# EAGLE board led (EAGLE 7.6.0)
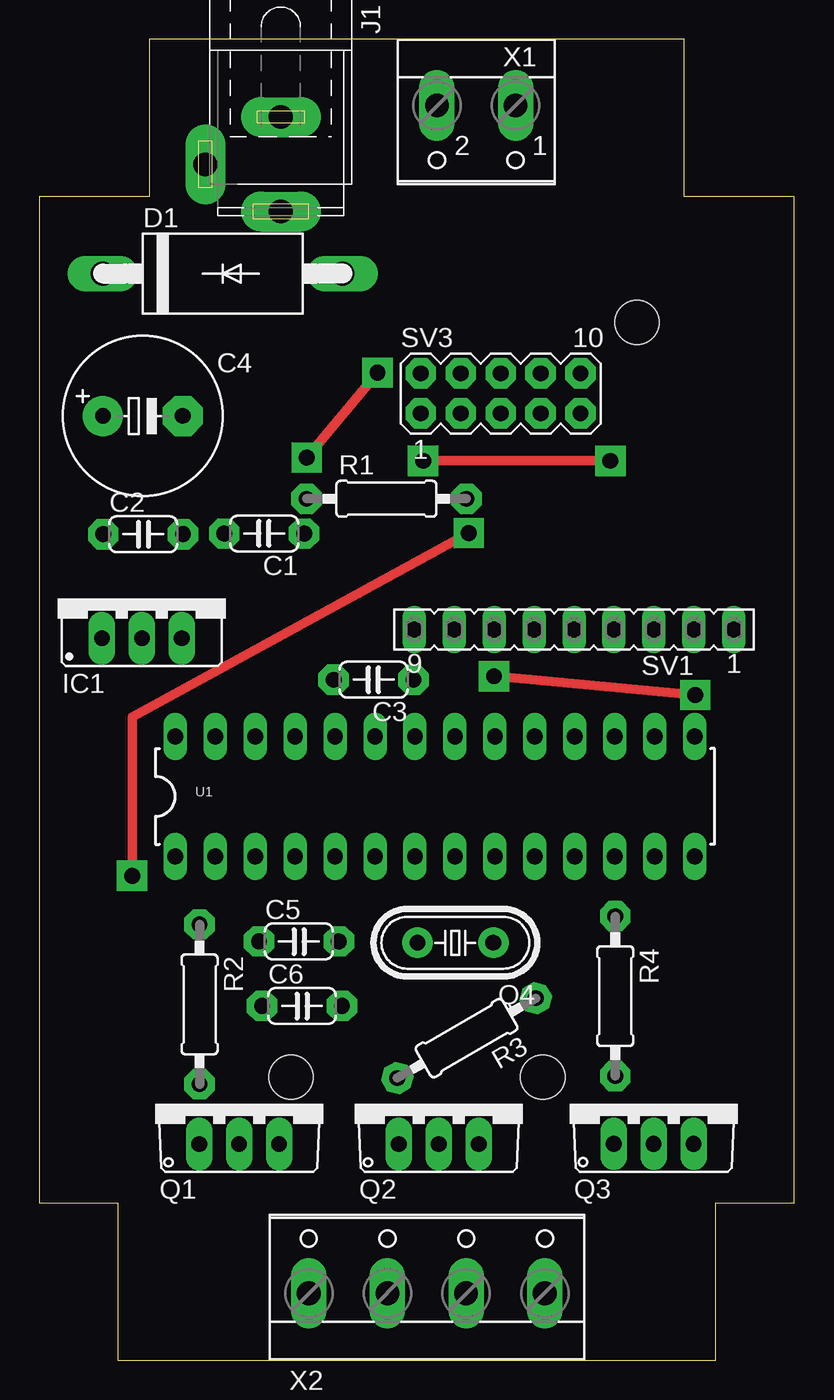
[diagram p0: board, top side]
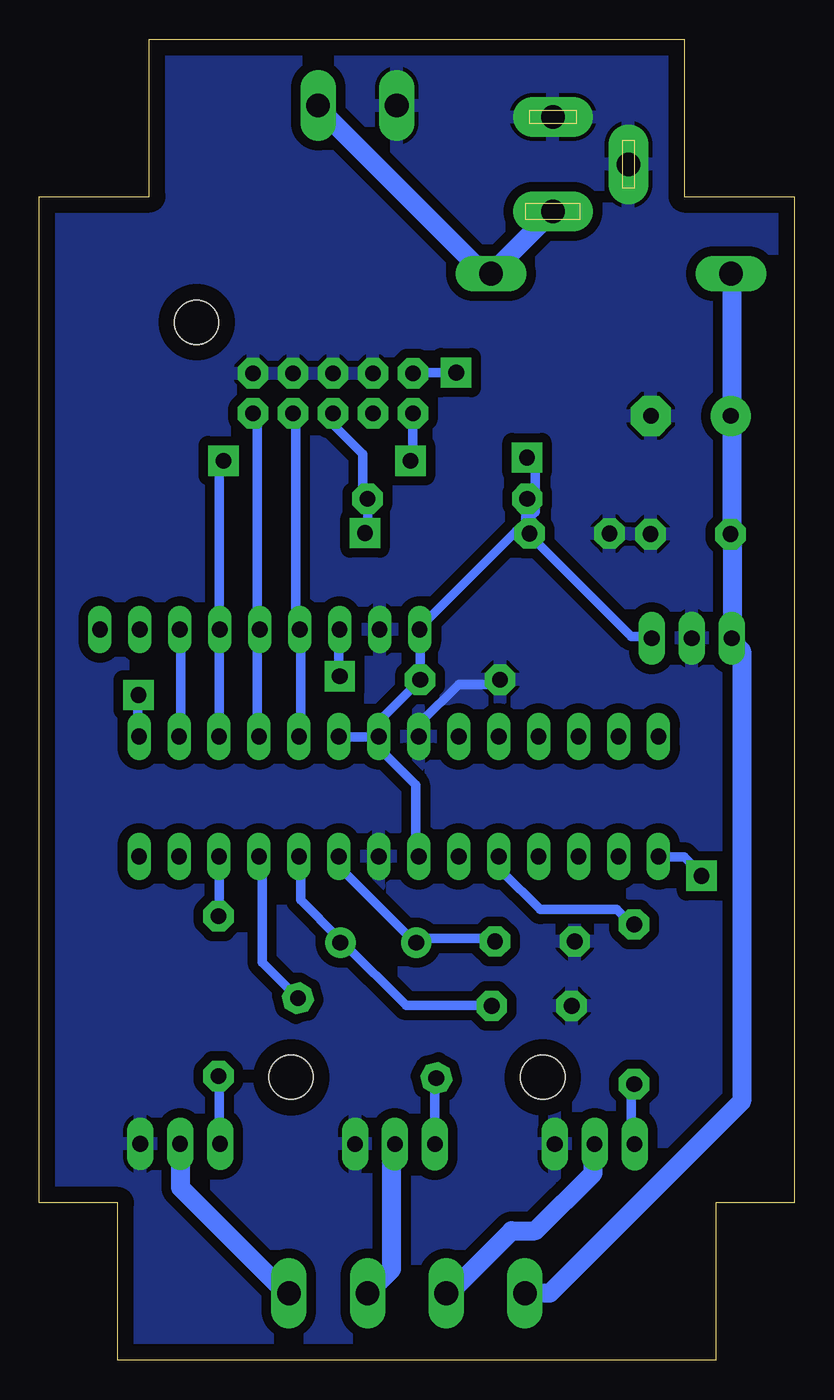
[diagram p1: board, bottom side, seen from below]

Size 48 x 84 mm. Coordinates in mm from the lower left corner, seen from the top.
Outline: 0,10 5,10 5,0 43,0 43,10 48,10 48,74 41,74 41,84 7,84 7,74 0,74 0,10
Copper layers (1*16): Top 0.035mm / dielectric 1.5mm / Bottom 0.035mm
Design rules "default": minimum track width 10mil, minimum drill 24mil, track to track 8mil, track to pad 8mil, pad to pad 8mil, via to via 8mil, smd to smd 8mil, copper to edge 40mil, drill to drill 8mil, minimum pad ring 10mil, minimum via ring 8mil, stop-mask expansion 4mil, vias tented up to drill 0mil, thermal gap 10mil
Net classes: 0 default: width 0.61 mm, clearance 0.61 mm; 1 3amp: width 1.219 mm, clearance 0.813 mm
Holes 2.8 mm at 16,18 32,18 38,66

## Footprints (pad centres in the part's own frame; a part is rotated, then mirrored left to right if it is on the bottom)
C050-024X044 = drill 1 pad 1.93 octagon: 1 -2.54,0; 2 2.54,0
E5-10,5 = drill 1 pad 2.54: + -2.54,0 | drill 1 pad 2.54 octagon: - 2.54,0
DO27-15 = drill 1.5 long: A 7.62,0; C -7.62,0
78XXS = drill 1 pad 1.676 long: GND 0,-2.54; IN -2.54,-2.54; OUT 2.54,-2.54
SPC4078 = drill 1.5 pad 2.54 long: 1 -3,0; 2 0,-4.8; 3 3,0
TO220AV = drill 1 pad 1.676 long: B -2.54,-2.54; C 0,-2.54; E 2.54,-2.54
HC49/S = drill 1 pad 1.93: 1 -2.413,0; 2 2.413,0
0207/10 = drill 1 pad 1.93 octagon: 1 -5.08,0; 2 5.08,0
FE09 = drill 1 long: 1 -10.16,0; 2 -7.62,0; 3 -5.08,0; 4 -2.54,0; 5 0,0; 6 2.54,0; 7 5.08,0; 8 7.62,0; 9 10.16,0
MA05-2 = drill 1 pad 1.93 octagon: 1 -5.08,-1.27; 2 -5.08,1.27; 3 -2.54,-1.27; 4 -2.54,1.27; 5 0,-1.27; 6 0,1.27; 7 2.54,-1.27; 8 2.54,1.27; 9 5.08,-1.27; 10 5.08,1.27
DIL28-3 = drill 1 long: 1 -16.51,-3.81; 2 -13.97,-3.81; 3 -11.43,-3.81; 4 -8.89,-3.81; 5 -6.35,-3.81; 6 -3.81,-3.81; 7 -1.27,-3.81; 8 1.27,-3.81; 9 3.81,-3.81; 10 6.35,-3.81; 11 8.89,-3.81; 12 11.43,-3.81; 13 13.97,-3.81; 14 16.51,-3.81; 15 16.51,3.81; 16 13.97,3.81; 17 11.43,3.81; 18 8.89,3.81; 19 6.35,3.81; 20 3.81,3.81; 21 1.27,3.81; 22 -1.27,3.81; 23 -3.81,3.81; 24 -6.35,3.81; 25 -8.89,3.81; 26 -11.43,3.81; 27 -13.97,3.81; 28 -16.51,3.81
W237-102 = drill 1.5 pad 2.184 long: 1 -2.5,-1.27 | drill 1.5 long: 2 2.5,-1.27
W237-4 = drill 1.5 pad 2.184 long: 1 -7.5,-1.27; 2 -2.5,-1.27; 3 2.5,-1.27; 4 7.5,-1.27

## Placement (x,y rotation side)
C1  100n  [C050-024X044]  14.29,52.57 180 top
C2  100n  [C050-024X044]  6.6,52.53 0 top
C3  100n  [C050-024X044]  21.25,43.28 180 top
C4  470u  [E5-10,5]  6.58,60.05 0 top
C5  18p  [C050-024X044]  16.5,26.63 0 top
C6  18p  [C050-024X044]  16.7,22.53 0 top
D1  BY550  [DO27-15]  11.65,69.1 0 top
IC1  [78XXS]  6.52,48.45 0 top
J1  [SPC4078]  15.35,76.05 270 top
Q1  TIP120  [TO220AV]  12.7,16.29 0 top
Q2  TIP120  [TO220AV]  25.39,16.29 0 top
Q3  TIP120  [TO220AV]  39.05,16.3 0 top
Q4  16MHz  [HC49/S]  26.45,26.55 180 top
R1  10k  [0207/10]  22.07,54.78 0 top
R2  1k  [0207/10]  10.19,22.63 270 top
R3  1k  [0207/10]  27.16,20.48 210 top
R4  1k  [0207/10]  36.61,23.15 270 top
SV1  [FE09]  33.99,46.47 180 top
SV3  [MA05-2]  29.33,61.48 0 top
U1  ATMEGA328P_PDIP  [DIL28-3]  25.15,35.85 0 top
X1  [W237-102]  27.78,78.52 180 top
X2  [W237-4]  24.63,5.53 0 top

## Library data of the parts
C1-C6 R1-R4 = rcl
D1 = diode
IC1 = v-reg
J1 = con-jack; OC_FARNELL: unknown; OC_NEWARK: unknown
Q1-Q3 = transistor-power
Q4 = crystal; OC_FARNELL: 1667008; OC_NEWARK: unknown
SV1 = con-lsta; OC_FARNELL: unknown; OC_NEWARK: unknown
SV3 = con-lstb; OC_FARNELL: unknown; OC_NEWARK: unknown
U1 = SparkFun-DigitalIC
X1 = con-wago-500; MPN: 237-102; OC_FARNELL: unknown; OC_NEWARK: 70K9898
X2 = con-wago-500; OC_FARNELL: unknown; OC_NEWARK: unknown

## Nets
+5V: C1.1 C3.1 IC1.OUT R1.1 SV1.9 SV3.2 U1.7 U1.20 U1.21
+12V [3amp]: C2.1 C4.+ D1.C IC1.IN X2.1
GND: C1.2 C2.2 C3.2 C4.- C5.1 C6.1 IC1.GND J1.1 J1.2 Q1.E Q2.E Q3.E SV1.8 SV3.4 SV3.6 SV3.8 SV3.10 U1.8 U1.22 X1.2
N$1 [3amp]: Q3.C X2.4
N$2: SV1.5 SV3.9 U1.18
N$3 [3amp]: D1.A J1.3 X1.1
N$4: Q1.B R2.2
N$5: R1.2 SV3.5 U1.1
N$6: SV1.4 SV3.1 U1.17
N$7: SV1.3 U1.16
N$8: SV1.7 U1.15
N$9 [3amp]: Q2.C X2.3
N$10 [3amp]: Q1.C X2.2
N$11: R4.1 U1.12
N$12: R3.1 U1.11
N$13: R2.1 U1.5
N$14: SV1.6 SV3.7 U1.19
N$15: Q2.B R3.2
N$16: Q3.B R4.2
S$1: C6.2 Q4.1 U1.10
S$2: C5.2 Q4.2 U1.9

## Tracks (layer width: path | path; a pad name or v marks a point on that pad's centre or on a via)
+5V  (via drill 1 pad 1.93)
  Top 0.61: v21.5,62.8 v17,57.4
  Bottom 0.61: IC1.OUT 9.14,46.02 10.36,46.02 16.76,52.43 C1.1 | 17.07,52.73 C1.1 | 17.07,53.03 C1.1 | 17.37,52.73 C1.1 | 17.07,53.34 17.07,54.56 R1.1 | 17.07,53.34 16.46,53.95 16.46,57 16.76,57.3 v17,57.4 | 17.07,53.34 C1.1 | SV3.2 24.08,62.79 21.64,62.79 v21.5,62.8 | U1.7 24.08,32.31 24.08,36.58 26.21,38.71 26.21,39.62 U1.21 | U1.20 28.96,39.62 26.52,39.62 U1.21 | U1.21 26.21,39.93 26.21,40.84 24.08,42.98 C3.1 23.77,43.28 23.77,46.33 SV1.9 23.77,46.63 17.68,52.73 C1.1
+12V
  Bottom 1.219: D1.C 3.96,68.89 3.96,60.35 C4.+ 3.96,59.74 3.96,53.03 C2.1 3.96,52.43 3.96,46.02 IC1.IN 3.66,45.41 3.35,45.11 3.35,16.46 15.54,4.27 17.07,4.27 X2.1
GND
  Bottom 0.61: 32.31,62.75 32.31,62.79 SV3.8 | U1.22 23.77,39.93 23.77,40.54 21.34,42.98 18.9,42.98 C3.2
  pour Bottom: 0,74 7,74 7,84 41,84 41,74 48,74 48,10 43,10 43,0 5,0 5,10 0,10
N$1
  Bottom 1.219: Q3.C 39.01,13.72 39.01,10.97 32.31,4.27 X2.4
N$2
  Bottom 0.61: SV3.9 34.14,60.05 34.14,46.63 SV1.5 34.14,46.33 34.14,39.93 U1.18
N$3
  Bottom 1.219: J1.3 15.54,72.85 19.2,69.19 D1.A 19.81,69.19 30.18,79.55 X1.1
N$4
  Bottom 0.61: Q1.B 10.36,14.02 10.36,17.37 R2.2
N$5  (via drill 1 pad 1.93)
  Top 0.61: v5.9,30.8 5.9,40.9 v27.3,52.6
  Bottom 0.61: 29.57,60.05 SV3.5 29.57,59.74 27.43,57.61 27.43,54.86 R1.2 27.13,54.56 27.13,52.73 v27.3,52.6 | U1.1 8.53,32 7.01,32 6.1,31.09 v5.9,30.8
N$6  (via drill 1 pad 1.93)
  Top 0.61: v36.3,57.2 v24.4,57.2
  Bottom 0.61: v24.4,57.2 24.25,57.35 SV3.1 | v36.3,57.2 36.58,57 36.58,46.63 SV1.4 36.58,46.33 36.58,39.93 U1.17
N$7
  Bottom 0.61: SV1.3 39.01,46.33 39.01,39.93 U1.16
N$8  (via drill 1 pad 1.93)
  Top 0.61: v28.9,43.5 v41.7,42.3
  Bottom 0.61: SV1.7 28.96,46.33 28.96,43.59 v28.9,43.5 | U1.15 41.76,39.93 41.76,42.06 v41.7,42.3
N$9
  Bottom 1.219: Q2.C 25.6,13.72 25.6,5.79 X2.3
N$10
  Bottom 1.219: Q1.C 12.8,13.72 12.8,11.89 16.46,8.23 17.98,8.23 21.95,4.27 X2.2
N$11
  Bottom 0.61: U1.12 36.58,32 36.58,28.35 R4.1
N$12
  Bottom 0.61: U1.11 33.83,32 33.83,25.3 31.7,23.16 R3.1
N$13
  Bottom 0.61: U1.5 18.59,32 18.59,31.09 16.15,28.65 11.28,28.65 10.36,27.74 R2.1
N$14
  Bottom 0.61: SV3.7 31.7,60.05 31.7,46.63 SV1.6 31.39,46.33 31.39,39.93 U1.19
N$15
  Bottom 0.61: Q2.B 22.86,14.02 22.86,17.68 R3.2
N$16
  Bottom 0.61: Q3.B 36.58,14.02 36.58,17.98 R4.2
S$1
  Bottom 0.61: U1.10 31.39,32 31.39,29.26 28.96,26.82 Q4.1 28.65,26.52 24.69,22.55 19.51,22.55 C6.2
S$2
  Bottom 0.61: U1.9 28.96,32 28.96,31.39 24.08,26.52 Q4.2 23.77,26.82 19.2,26.82 C5.2